# EAGLE board 3g-board-vita (EAGLE 8.2.2)
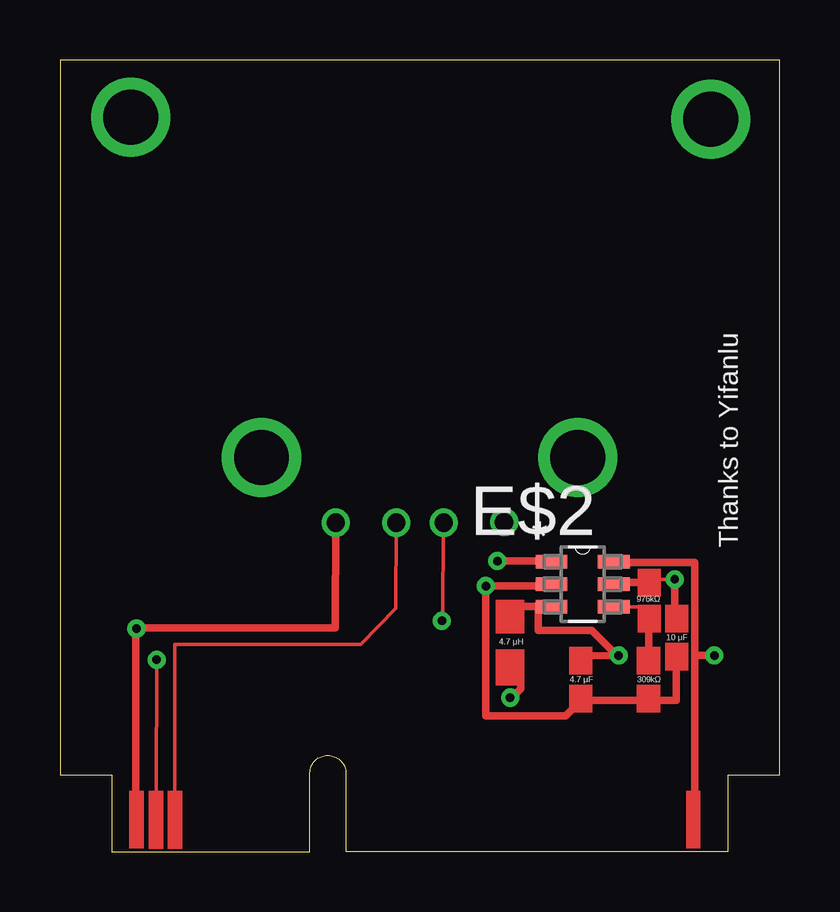
[diagram p0: board, top side]
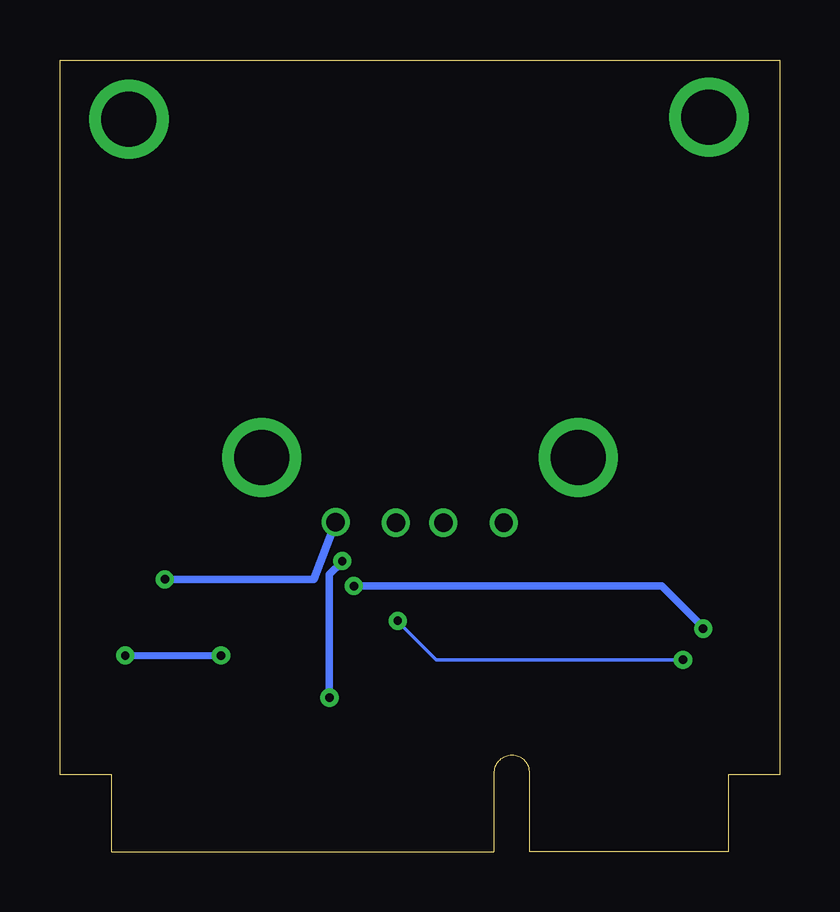
[diagram p1: board, bottom side, seen from below]

Size 29.98 x 33.01 mm. Coordinates in mm from the lower left corner, seen from the top.
Outline: 27.84,0 27.84,3.2 29.98,3.2 29.98,33.01 0,33.01 0,3.2 2.15,3.2 2.15,0 10.41,0 10.41,3.29 arc-90 11.14,4.01 11.16,4.01 arc-90 11.91,3.26 11.91,0 27.84,0
Copper layers (1*16): Top 0.035mm / dielectric 1.5mm / Bottom 0.035mm
Design rules "default": minimum track width 6mil, minimum drill 0.35mm, track to track 6mil, track to pad 6mil, pad to pad 6mil, via to via 6mil, smd to smd 6mil, copper to edge 40mil, drill to drill 6mil, minimum pad ring 10mil, minimum via ring 8mil, stop-mask expansion 4mil, vias tented up to drill 0mil, thermal gap 10mil

## Footprints (pad centres in the part's own frame; a part is rotated, then mirrored left to right if it is on the bottom)
SOT95P270X145-6N = smd 1.321 x 0.559: 1 -1.295,0.94; 2 -1.295,0; 3 -1.295,-0.94; 4 1.295,-0.94; 5 1.295,0; 6 1.295,0.94

## Placement (x,y rotation side)
E$2  [SOT95P270X145-6N]  21.78,11.15 0 top

## Library data of the parts
E$2 = Microchip_By_element14_Batch_1

## Tracks (layer width: path | path; a pad name or v marks a point on that pad's centre or on a via)
S$1  (via drill 0.76)
  Top 0.152: v11.49,13.72 11.49,13.79
  Top 0.305: 3.16,2.34 3.16,9.32 11.47,9.32 v11.49,13.72
S$2  (via drill 2.29)
  other vias: 8.39,16.43 2.95,30.62 27.11,30.54
S$3
  Top 0.305: 26.45,2.39 26.45,8.18 | 26.45,8.18 26.45,12.07 23.61,12.07 | 26.45,8.18 27.29,8.18
  Bottom 0.305: 27.29,8.18 23.3,8.15
S$4  (via drill 0.35)
  Top 0.152: 4,2.39 v4.03,8
  Bottom 0.152: v4.03,8 14.31,8 15.94,9.63
S$5  (via drill 0.35)
  other vias: 15.91,9.63
S$6
  Top 0.152: 15.94,9.63 15.96,13.74
S$7  (via drill 2.29)
  other vias: 21.58,16.43
S$8  (via drill 0.76)
  other vias: 14.01,13.72
S$9  (via drill 0.76)
  other vias: 15.99,13.72
S$10
  Top 0.152: 4.79,2.44 4.79,8.64 12.53,8.64 13.98,10.14 14.01,13.69
S$11
  Top 0.152: 23.66,10.21 24.14,10.21
S$12
  Top 0.305: 24.52,9.37 24.52,8.43
S$13
  Top 0.305: 23.66,11.23 24.07,11.23
S$14  (via drill 0.35, 0.76)
  Top 0.152: v25.62,11.35 24.6,11.35
  Top 0.305: v25.62,11.35 25.62,10.21
  Bottom 0.305: v25.62,11.35 19.42,11.35 v18.5,13.74
S$15
  Top 0.305: 17.74,11.07 20,11.07
S$16  (via drill 0.35)
  other vias: 3.19,9.3
S$17  (via drill 0.35)
  Bottom 0.305: 3.16,9.32 4.91,11.07 v17.74,11.07
S$18  (via drill 0.35)
  other vias: 27.27,8.18
S$19  (via drill 0.35)
  Top 0.305: v23.28,8.18 21.83,8.15
S$20
  Top 0.305: 23.25,8.13 22.16,9.22 19.93,9.22 19.93,10.31
S$21
  Top 0.152: 25.06,6.3 24.45,6.3
  Top 0.305: 25.67,8.13 25.67,6.3 25.06,6.3 | 24.45,6.3 22.14,6.3
S$22  (via drill 0.35)
  Top 0.305: 19.93,12.12 v18.22,12.12
S$23
  Top 0.305: 19.29,10.24 19.85,10.24
S$24  (via drill 0.35)
  other vias: 18.76,6.43
S$25
  Bottom 0.305: 18.22,12.09 18.76,11.56 18.76,6.4
S$26
  Top 0.305: 18.76,6.35 19.19,6.78 19.19,7.29
S$27
  Top 0.305: 21.63,6.22 21.07,5.66 17.74,5.66 17.74,11.1
(copper drawn outside any net)
  shapes: Top area x14

## Text on the board
tStop: HaiHakkuIku / VitaUSB / v 3g-03
_tsilk: Thanks to Yifanlu | 976kΩ | 4.7 μH | 10 μF | 4.7 μF | 309kΩ